# Altium PCB PCB_v1.PcbDoc
Units mil, origin at the board's own origin, x right, y up, seen from the top; angles counter-clockwise.
Board outline 2519.68 x 1299.21 mil, 2 copper layers (Top Layer, Bottom Layer); 35 components, 21 nets, 155 pads, 15 vias.
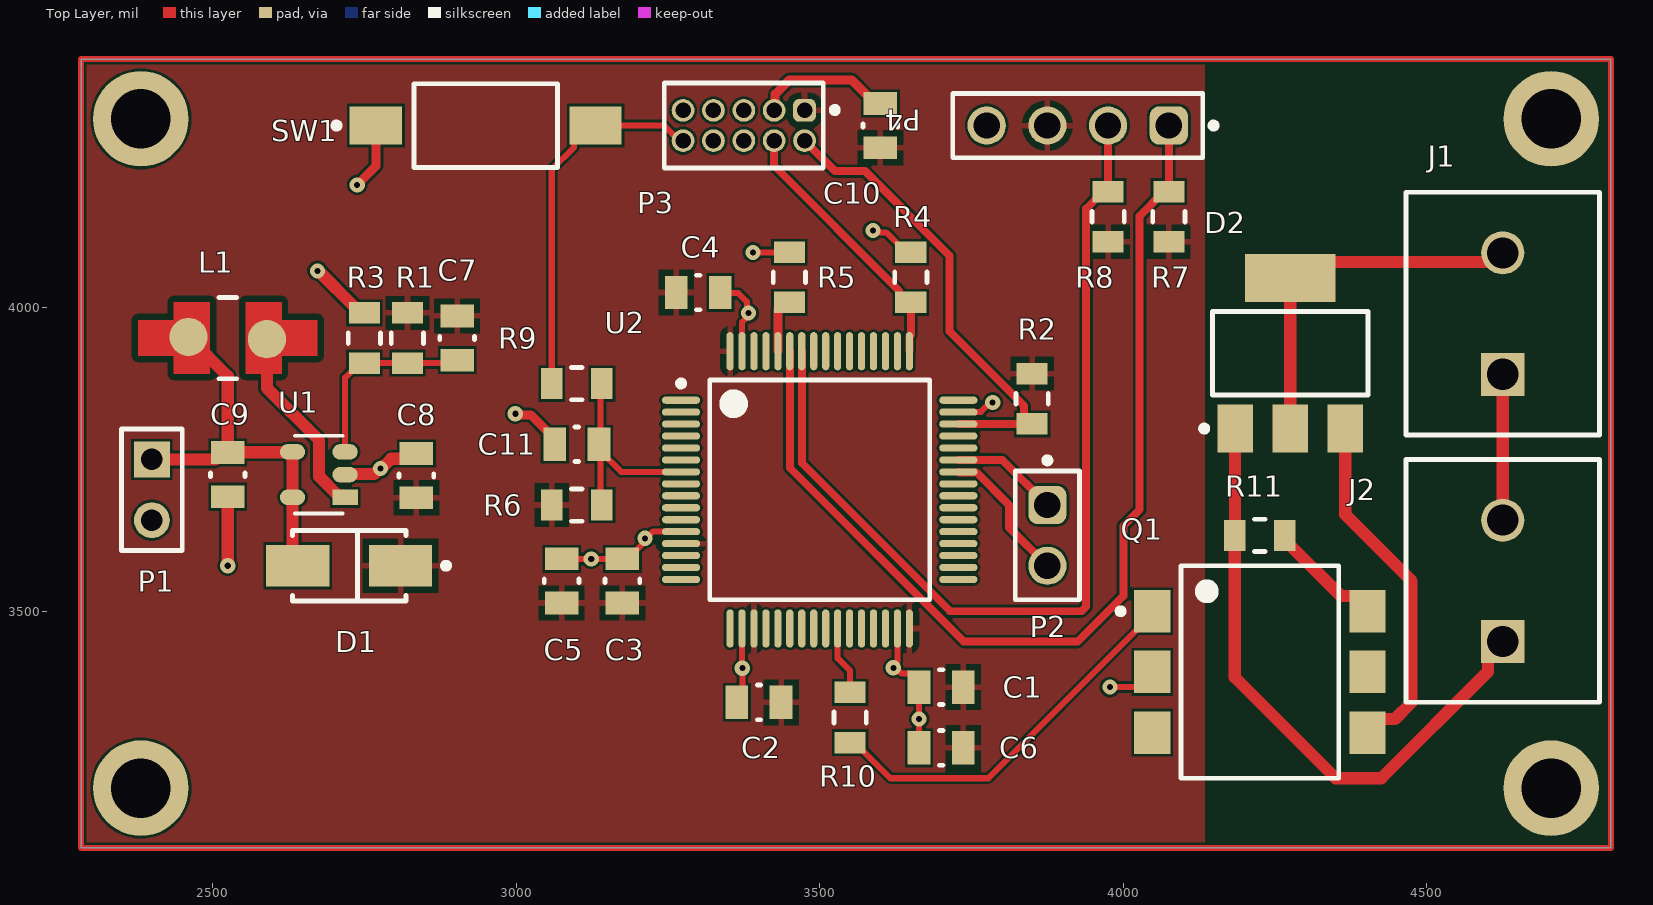
[diagram p0: Top Layer view]
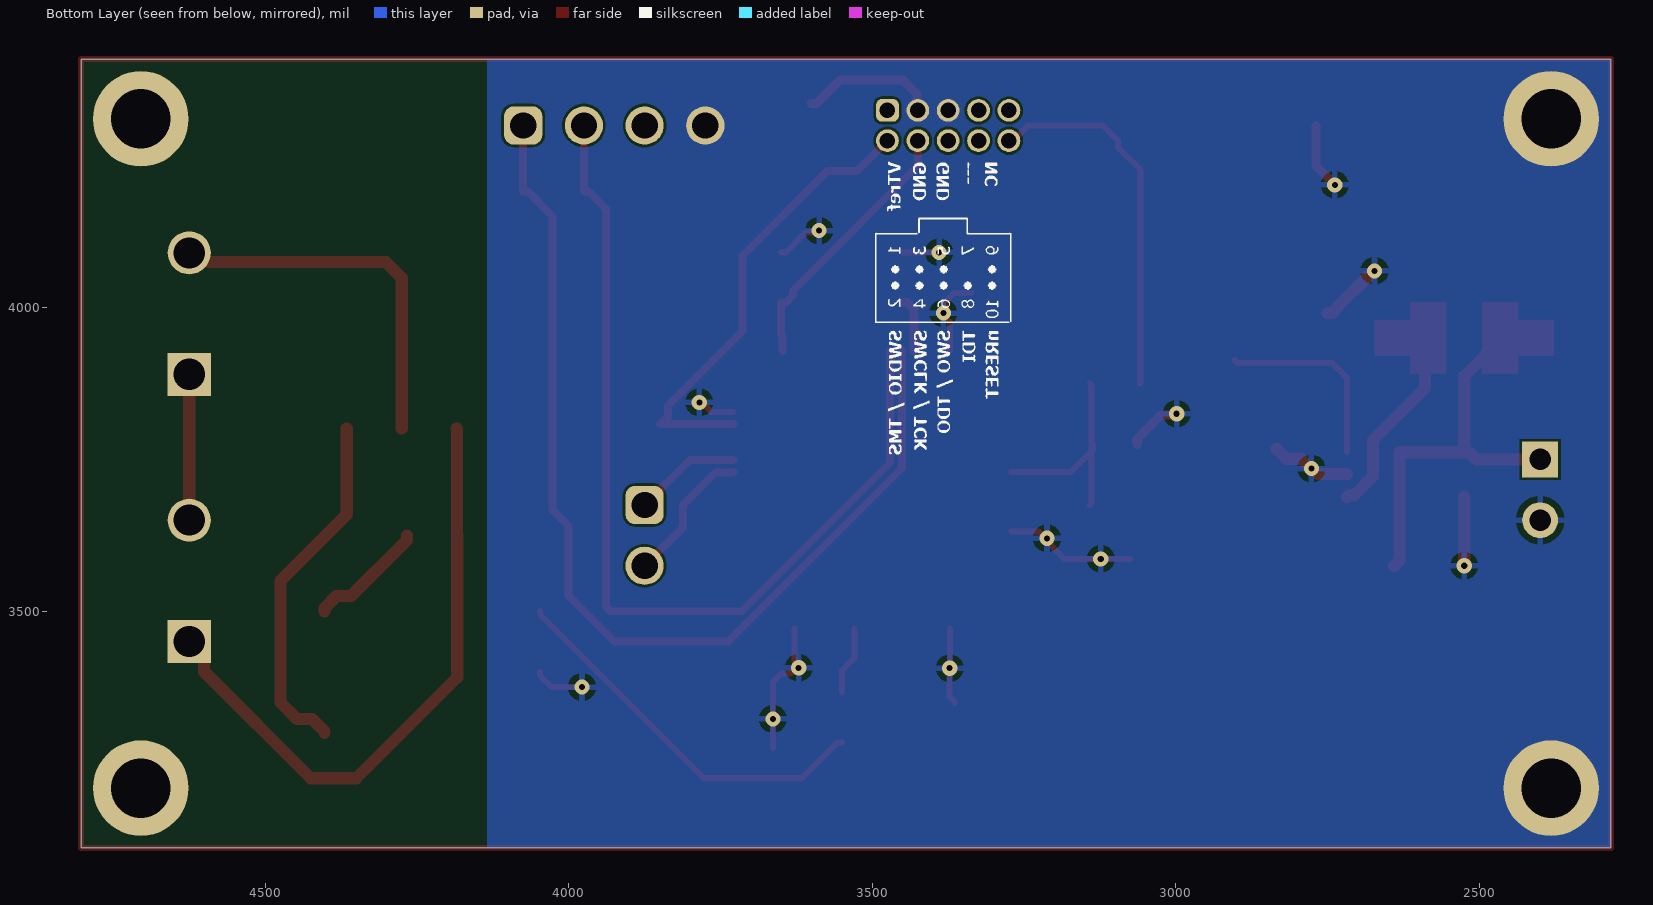
[diagram p1: Bottom Layer view, seen from below]
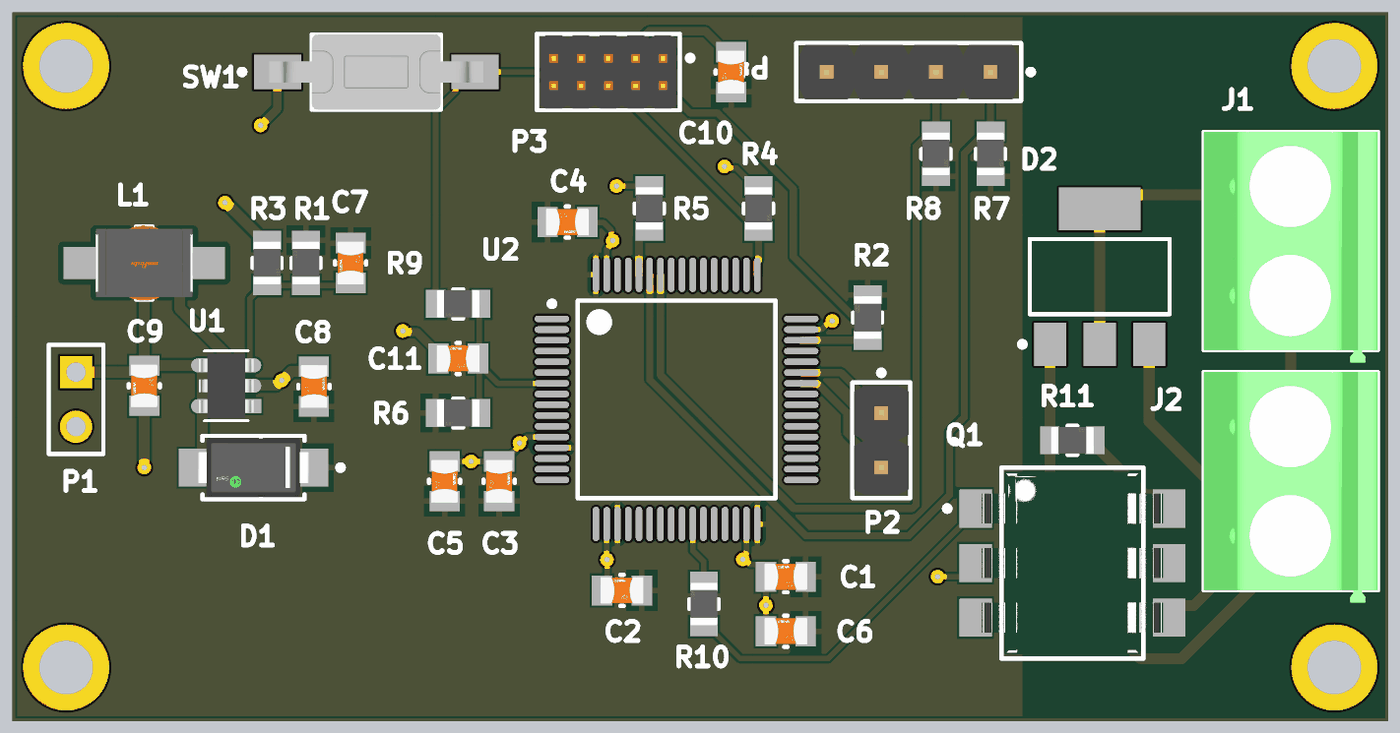
[diagram p2: 3D render of the assembled board from above, using the file's embedded part models]

## Layer stack, top to bottom
Top Solder: solder mask 0.4, Solder Resist, Dk 3.5
Top Layer: signal copper 1.4
Dielectric 1: dielectric 12.6, FR-4, Dk 4.6
Bottom Layer: signal copper 1.4
Bottom Solder: solder mask 0.4, Solder Resist, Dk 3.5

## Board outline
2283.46,3110.24 2283.46,4409.45 4803.15,4409.45 4803.15,3110.24

## Design rules (kind name [scope] priority, off if disabled: settings)
AssemblyTestPointUsage [All] p1: isadvanced=TRUE
AssemblyTestpoint [All] p1: isadvanced=TRUE testpointundercomponent=TRUE minsize=40 maxsize=100 preferedsize=60 minholesize=0 maxholesize=40 preferedholesize=32 testpointgrid=1 usegrid=TRUE gridtolerance=0.01 allowsidetop=TRUE allowsidebottom=TRUE
Clearance Clearance_1 [OnMid vs OnMid] p1: gap=4 ignorepadtopadclearanceinfootprint=FALSE except(5: Arc-Via Track-Via SMDPad-Via THPad-Via Via-Via Via-Text; 10: Arc-Hole Track-Hole SMDPad-Hole THPad-Hole Via-Hole Fill-Fill Fill-Poly Fill-Region Fill-Hole Poly-Poly Poly-Region Poly-Hole Region-Region Region-Hole Text-Hole Hole-Hole) sourcerule=47 cellrowname=All cellrowtype=0 cellcolname=All cellcoltype=0 innerlayers=TRUE
Clearance Clearance_2 [(ExistsOnLayer('Top Layer') Or ExistsOnLayer('Bottom Layer')) vs (ExistsOnLayer('Top Layer') Or ExistsOnLayer('Bottom Layer'))] p2: gap=4 ignorepadtopadclearanceinfootprint=FALSE except(5: Arc-Via Track-Via SMDPad-Via THPad-Via Via-Via Via-Text; 10: Arc-Hole Track-Hole SMDPad-Hole THPad-Hole Via-Hole Fill-Fill Fill-Poly Fill-Region Fill-Hole Poly-Poly Poly-Region Poly-Hole Region-Region Region-Hole Text-Hole Hole-Hole) sourcerule=47 cellrowname=All cellrowtype=0 cellcolname=All cellcoltype=0 outerlayers=TRUE
Clearance [All] p3: gap=10 ignorepadtopadclearanceinfootprint=FALSE ismatrix=TRUE
ComponentClearance [All] p1: isadvanced=TRUE gap=10 collisioncheckmode=3 verticalgap=10 showdistances=FALSE
FabricationTestPointUsage [All] p1: isadvanced=TRUE valid=0 allowmultiple=FALSE
FabricationTestpoint [All] p1: isadvanced=TRUE side=3 testpointundercomponent=TRUE minsize=40 maxsize=100 preferedsize=60 minholesize=0 maxholesize=40 preferedholesize=32 testpointgrid=1 allowsidetop=TRUE allowsidebottom=TRUE usegrid=TRUE gridtolerance=0.01
FanoutControl Fanout_BGA [IsBGA] p1: isadvanced=TRUE bgadir=Out bgaviamode=Centered fanoutstyle=Auto fanoutdirection=Alternating viagrid=1 // Fanout_BGA (Default Rule)
FanoutControl Fanout_LCC [IsLCC] p2: isadvanced=TRUE bgadir=Out bgaviamode=Centered fanoutstyle=Auto fanoutdirection=Alternating viagrid=1 // Fanout_LCC (Default Rule)
FanoutControl Fanout_SOIC [IsSOIC] p3: isadvanced=TRUE bgadir=Out bgaviamode=Centered fanoutstyle=Auto fanoutdirection=Alternating viagrid=1 // Fanout_SOIC (Default Rule)
FanoutControl Fanout_Small [(CompPinCount < 5)] p4: isadvanced=TRUE bgadir=Out bgaviamode=Centered fanoutstyle=Auto fanoutdirection=OutThenIn viagrid=1 // Fanout_Small (Default Rule)
FanoutControl Fanout_Default [All] p5: isadvanced=TRUE bgadir=Out bgaviamode=Centered fanoutstyle=Auto fanoutdirection=Alternating viagrid=1 // Fanout_Default (Default Rule)
Height [All] p1: isadvanced=TRUE minheight=0 maxheight=1000 prefheight=500
HoleSize [All] p1: isadvanced=TRUE absolutevalues=TRUE maxlimit=100 minlimit=1 maxpercent=80.000 minpercent=20.000
HoleToHoleClearance [All] p1: isadvanced=TRUE gap=10 allowstackedmicrovias=TRUE
LayerPairs [All] p1: isadvanced=TRUE enforce=TRUE
MinimumSolderMaskSliver [All] p1: isadvanced=TRUE minsoldermaskwidth=10
NetAntennae [All] p1: isadvanced=TRUE netantennaetolerance=0
PasteMaskExpansion [All] p1: isadvanced=TRUE expansion=0
PlaneClearance [All] p1: isadvanced=TRUE clearance=20
PlaneConnect [All] p1: isadvanced=TRUE planeconnectstyle=Relief reliefexpansion=20 reliefentries=4 reliefconductorwidth=10 reliefairgap=10
PolygonConnect [All] p1: connectstyle=Relief reliefconductorwidth=10 reliefentries=4 polygonreliefangle="90 Angle" airgapwidth=10
RoutingCorners [All] p1: isadvanced=TRUE cornerstyle=45-Degree minsetback=100 maxsetback=100
RoutingPriority [All] p1: isadvanced=TRUE routingpriority=0
RoutingVias [All] p1: holewidth=10 width=25 viastyle="Through Hole" minholewidth=10 minwidth=25 maxholewidth=10 maxwidth=25
ShortCircuit [All] p1: isadvanced=TRUE allowed=FALSE
SilkToSilkClearance [All] p1: isadvanced=TRUE silktosilkclearance=10
SilkToSolderMaskClearance [IsPad] p1: isadvanced=TRUE minsilkscreentomaskgap=10 clearancetoexposedcopper=TRUE
SolderMaskExpansion [All] p1: isadvanced=TRUE expansion=4 istentingtop=FALSE
SupplyNets "Schematic Supply Nets_3" [InNet('BATT')] p1: voltage=0.000
SupplyNets "Schematic Supply Nets_4" [InNet('+3V3')] p2: isadvanced=TRUE voltage=0.000
SupplyNets "Schematic Supply Nets_2" [InNet('GND')] p3: isadvanced=TRUE voltage=0.000
SupplyNets "Schematic Supply Nets_1" [InNet('~230')] p4: isadvanced=TRUE voltage=0.000
SupplyNets "Schematic Supply Nets" [InNet('~N')] p5: isadvanced=TRUE voltage=0.000
UnRoutedNet [All] p1: isadvanced=TRUE
UnpouredPolygon [All] p1: isadvanced=TRUE
Width MaxMinWidth_1 [InNet('SWD_CLK')] p1: maxlimit=13.12 minlimit=13.12 preferedwidth=13.12 impedanceprofiledriven=TRUE impedanceprofileid={453E66AC-1D73-4F09-8EF6-78236249AB15} impedanceprofilevalue=50.000000 minimp=50.000000 maximp=50.000000 favimp=50.000000
Width MaxMinWidth_2 [InNet('SWD_DIO')] p2: maxlimit=13.12 minlimit=13.12 preferedwidth=13.12 impedanceprofiledriven=TRUE impedanceprofileid={453E66AC-1D73-4F09-8EF6-78236249AB15} impedanceprofilevalue=50.000000 minimp=50.000000 maximp=50.000000 favimp=50.000000
Width MaxMinWidth_3 [InNet('UART_RX')] p3: maxlimit=13.12 minlimit=13.12 preferedwidth=13.12 impedanceprofiledriven=TRUE impedanceprofileid={453E66AC-1D73-4F09-8EF6-78236249AB15} impedanceprofilevalue=50.000000 minimp=50.000000 maximp=50.000000 favimp=50.000000
Width MaxMinWidth_4 [InNet('UART_TX')] p4: maxlimit=13.12 minlimit=13.12 preferedwidth=13.12 impedanceprofiledriven=TRUE impedanceprofileid={453E66AC-1D73-4F09-8EF6-78236249AB15} impedanceprofilevalue=50.000000 minimp=50.000000 maximp=50.000000 favimp=50.000000
Width MaxMinWidth_5 [InNet('I2C_SCL')] p5: maxlimit=13.12 minlimit=13.12 preferedwidth=13.12 impedanceprofiledriven=TRUE impedanceprofileid={453E66AC-1D73-4F09-8EF6-78236249AB15} impedanceprofilevalue=50.000000 minimp=50.000000 maximp=50.000000 favimp=50.000000
Width MaxMinWidth_6 [InNet('I2C_SDA')] p6: maxlimit=13.12 minlimit=13.12 preferedwidth=13.12 impedanceprofiledriven=TRUE impedanceprofileid={453E66AC-1D73-4F09-8EF6-78236249AB15} impedanceprofilevalue=50.000000 minimp=50.000000 maximp=50.000000 favimp=50.000000
Width [All] p7: maxlimit=20 minlimit=4 preferedwidth=10 minimp=50.000000 maximp=50.000000 favimp=50.000000
4 further rules are at their usual default settings.

## Components (designator, comment, footprint, x,y, rotation, side; value= is the part's Value field where it differs from the comment)
C1 "10uF" FP-CC0805-0_85-MFG 3700,3375 r180 top value="100 nF"
C2 "100nF" FP-CC0805-0_85-MFG 3400,3350 r180 top value="100 nF"
C3 "100nF" FP-CC0805-0_85-MFG 3175,3550 r90 top value="100 nF"
C4 "100nF" FP-CC0805-0_85-MFG 3300,4025 r0 top value="100 nF"
C5 "100nF" FP-CC0805-0_85-MFG 3075,3550 r90 top value="100 nF"
C6 "1uF" FP-CC0805-0_85-MFG 3700,3275 r180 top value="100 nF"
C7 "10pF" FP-CC0805-0_85-MFG 2902.87,3950 r270 top value="100 nF"
C8 "10uF" FP-CC0805-0_85-MFG 2835.78,3723.55 r90 top value="100 nF"
C9 "4.7uF" FP-CC0805-0_85-MFG 2525,3725 r270 top value="100 nF"
C10 "100nF" FP-CC0805-0_85-MFG 3600,4300 r90 top value="100 nF"
C11 "100nF" FP-CC0805-0_85-MFG 3100,3775 r180 top value="100 nF"
D1 "SS14" FP-403AE-MFG 2725,3575 r0 top
D2 "Z0107MNT1G" ONSC-SOT-223-4-318E-04_V 4275,3925 r90 top
J1 "1729128" PHOE-1729128-2_V 4625,3990.31 r90 top
J2 "1729128" PHOE-1729128-2_V 4625,3550 r90 top
L1 "10uH" FP-LQH43CN_03-MFG 2525,3950 r180 top
P1 "Header 2" HDR1X2 2400,3750 r270 top
P2 "61300211121" 61300211121 3875,3625 r270 top
P3 "62201021121" 62201021121 3375,4300 r180 top
P4 "61300411121" 61300411121 3925,4300 r180 top
Q1 "MOC3021SR2VM" FP-646BY-MFG 4225,3400 r0 top
R1 "1M Ohm" FP-RMCF0805-MFG 2821.02,3950 r90 top
R2 "10k Ohm" FP-RMCF0805-MFG 3850,3850 r90 top
R3 "600k Ohm" FP-RMCF0805-MFG 2750,3950 r270 top
R4 "10k Ohm" FP-RMCF0805-MFG 3650,4050 r270 top
R5 "10k Ohm" FP-RMCF0805-MFG 3450,4050 r90 top
R6 "10k Ohm" FP-RMCF0805-MFG 3100,3675 r180 top
R7 "4k7 Ohm" FP-RMCF0805-MFG 4075,4150 r270 top
R8 "4k7 Ohm" FP-RMCF0805-MFG 3975,4150 r270 top
R9 "1k Ohm" FP-RMCF0805-MFG 3100,3875 r180 top
R10 "1k Ohm" FP-RMCF0805-MFG 3550,3325 r90 top
R11 "1k Ohm" FP-RMCF0805-MFG 4225,3625 r0 top
SW1 "FSMSMTR" TECO-FSMSMTR_V 2950,4300 r0 top
U1 "AP3031KTR-G1" SOT23-6_DIO 2675,3725 r180 top
U2 "STM32L053R8T6D" STM-LQFP64_L 3500,3700 r0 top

## Footprints (in the part's own frame and the unit in brackets; to place one, negate y for a bottom-side part, rotate by r counter-clockwise, add the part's x,y. Pads: shape width x height; smd on the part's side, far side on the other; paste and mask are expansions set on the pad)
61300211121 [mm] "Pin Header, pitch 2.54 mm, THT, Vertical, single row, 2p"
  rrect50% 1.6x1.6 hole 1.1: 1(-1.27,0)
  round 1.6 hole 1.1: 2(1.27,0)
  silkscreen extent -3.26,-1.35 2.69,1.35, body extent -2.54,-1.27 2.54,1.27, height 8.57
61300411121 [mm] "Pin Header, pitch 2.54 mm, THT, Vertical, single row, 4p"
  rrect50% 1.6x1.6 hole 1.1: 1(-3.81,0)
  round 1.6 hole 1.1: 2(-1.27,0) 3(1.27,0) 4(3.81,0)
  silkscreen extent -5.8,-1.35 5.23,1.35, body extent -5.08,-1.27 5.08,1.27, height 8.57
62201021121 [mm] "Pin Header, pitch 1.27 mm, THT, Vertical, dual row, 10p"
  rrect50% 0.95x0.95 hole 0.65: 1(-2.54,-0.635)
  round 0.95 hole 0.65: 2(-2.54,0.635) 3(-1.27,-0.635) 4(-1.27,0.635) 5(0,-0.635) 6(0,0.635) 7(1.27,-0.635) 8(1.27,0.635) 9(2.54,-0.635) 10(2.54,0.635)
  silkscreen extent -3.93,-1.78 3.32,1.78, body extent -3.17,-1.7 3.18,1.7, height 5.33
FP-403AE-MFG [mm]
  rect 2.65x1.75 smd paste+0 mask+0: 1(-2.15,0) 2(2.15,0)
  silkscreen extent -2.37,-1.48 4.18,1.48, body extent -3.57,-1.58 3.57,1.58, height 0.25
FP-646BY-MFG [mm]
  rect 1.52x1.78 smd paste+0 mask+0: 1(-4.505,2.54) 2(-4.505,0) 3(-4.505,-2.54) 4(4.505,-2.54) 5(4.505,0) 6(4.505,2.54)
  silkscreen extent -5.95,-4.44 3.3,4.44, body extent -5.37,-4.67 5.37,4.67, height 0.25
FP-CC0805-0_85-MFG [mm]
  rect 0.95x1.4 smd paste+0 mask+0: 1(-0.925,0) 2(0.925,0)
  silkscreen extent -0.08,-0.72 0.08,0.72, body extent -1.6,-1.05 1.6,1.05, height 0.25
FP-LQH43CN_03-MFG [mil]
  round 63.12 smd paste+0 mask+0: 1(-64.59,1.85) 2(64.59,-1.85)
  Top Layer region: 147.64,29.53 88.58,29.53 88.58,59.06 29.53,59.06 29.53,-59.06 88.58,-59.06 88.58,-29.53 147.64,-29.53 147.64,29.53
  Top Layer region: -147.64,29.53 -88.58,29.53 -88.58,59.06 -29.53,59.06 -29.53,-59.06 -88.58,-59.06 -88.58,-29.53 -147.64,-29.53 -147.64,29.53
  silkscreen extent -15,-67 15,67, body extent -152,-71 152,71, height 10
FP-RMCF0805-MFG [mm]
  rect 0.9x1.3 smd paste+0 mask+0: 1(-1.05,0) 2(1.05,0)
  silkscreen extent -0.23,-0.67 0.23,0.67, body extent -1.6,-0.77 1.6,0.77, height 0.25
HDR1X2 [mm] "Connector; Header; 2 Position"
  rect 1.5x1.5 hole 0.9: 1(0,0)
  round 1.5 hole 0.9: 2(2.54,0)
  silkscreen extent -1.27,-1.27 3.81,1.27
ONSC-SOT-223-4-318E-04_V [mm] "SOT223, 4-Leads, Body 6.5x3.5mm, Pitch 2.3mm"
  rect 2x1.5 smd: 1(-3.15,2.3) 2(-3.15,0) 3(-3.15,-2.3)
  rect 2x3.8 smd: 4(3.15,0)
  silkscreen extent -3.27,-3.25 1.75,3.72, body extent -1.75,-3.25 1.75,3.25, height 1.75
PHOE-1729128-2_V [mm] "Receptacle, 2-Leads, Body 8.1x10.16mm, Pitch 5.08mm"
  rect 1.8x1.8 hole 1.3: 1(-2.54,0)
  round 1.8 hole 1.3: 2(2.54,0)
  silkscreen extent -5.08,-4.05 5.08,4.05, body extent -5.65,-4.05 5.08,4.05, height 10.01
SOT23-6_DIO [mm]
  rect 1.06x0.65 smd paste+0 mask+0: 1(-1.1,0.95)
  oval 1.06x0.65 smd paste+0 mask+0: 2(-1.1,0) 3(-1.1,-0.95) 4(1.1,-0.95) 5(1.1,0.95)
  silkscreen extent -1,-1.63 1,1.63, body extent -1.28,-1.5 1.28,1.5, height 1.45
STM-LQFP64_L [mm] "QFP, 64-Leads, Body 10x10mm, Pitch 0.5mm, IPC High Density"
  oval 1.6x0.3 smd: 1(-5.8,3.75) 2(-5.8,3.25) 3(-5.8,2.75) 4(-5.8,2.25) 5(-5.8,1.75) 6(-5.8,1.25) 7(-5.8,0.75) 8(-5.8,0.25) 9(-5.8,-0.25) 10(-5.8,-0.75) 11(-5.8,-1.25) 12(-5.8,-1.75) 13(-5.8,-2.25) 14(-5.8,-2.75) 15(-5.8,-3.25) 16(-5.8,-3.75) 33(5.8,-3.75) 34(5.8,-3.25) 35(5.8,-2.75) 36(5.8,-2.25) 37(5.8,-1.75) 38(5.8,-1.25) 39(5.8,-0.75) 40(5.8,-0.25) 41(5.8,0.25) 42(5.8,0.75) 43(5.8,1.25) 44(5.8,1.75) 45(5.8,2.25) 46(5.8,2.75) 47(5.8,3.25) 48(5.8,3.75)
  oval 0.3x1.6 smd: 17(-3.75,-5.8) 18(-3.25,-5.8) 19(-2.75,-5.8) 20(-2.25,-5.8) 21(-1.75,-5.8) 22(-1.25,-5.8) 23(-0.75,-5.8) 24(-0.25,-5.8) 25(0.25,-5.8) 26(0.75,-5.8) 27(1.25,-5.8) 28(1.75,-5.8) 29(2.25,-5.8) 30(2.75,-5.8) 31(3.25,-5.8) 32(3.75,-5.8) 49(3.75,5.8) 50(3.25,5.8) 51(2.75,5.8) 52(2.25,5.8) 53(1.75,5.8) 54(1.25,5.8) 55(0.75,5.8) 56(0.25,5.8) 57(-0.25,5.8) 58(-0.75,5.8) 59(-1.25,5.8) 60(-1.75,5.8) 61(-2.25,5.8) 62(-2.75,5.8) 63(-3.25,5.8) 64(-3.75,5.8)
  silkscreen extent -5.92,-4.6 4.6,4.6, body extent -5,-5 5,5, height 1.6
TECO-FSMSMTR_V [mm] "SMD, 2-Leads, Body 6x3.5mm, Pitch 9.19mm"
  rect 2.2x1.6 smd: 1(-4.595,0)
  rect 2.18x1.6 smd: 2(4.595,0)
  silkscreen extent -6.37,-1.75 3,1.75, body extent -4.98,-1.75 4.98,1.75, height 4.4

## Part data
C1 C2 C3 C4 C5 C6 C7 C8 C9 C10 C11: library part CMP-2100-03606-3, "CAP CER 0.1UF 50V X7R 0805", Capacitance="100 nF", Manufacturer=Yageo, Manufacturer Part Number=CC0805KRX7R9BB104, Package=CC0805-0.85, Temperature="-30°C to +85°C", Temperature Characteristic=X7R, Temperature Range High=+85°C, Temperature Range Low=-30°C, Tolerance=0.1, Voltage Rating="50 V", Automotive=No, Category=Cap, ComponentLink2Description=Datasheet, ComponentLink2URL=http://www.yageo.com/documents/recent/UPY-GPHC_Y5V_6.3V-to-50V_8.pdf, Device Class L1="Passive Components", Device Class L2=Capacitors, Device Class L3="Ceramic Capacitors", Digikey Description="CAP CER 0.1UF 50V X7R 0805", Footprint Url=http://www.yageo.com/exep/pages/download/literatures/UPY-C_GEN_24.pdf, Height=0.95mm, Ipc Land Pattern Name=CAPC200125X85, Lead Free=Yes, Material=Ceramic, Mouser Description="Multilayer Ceramic Capacitors MLCC - SMD/SMT 100nF 50V X7R 10%", Octopart=https://octopart.com/cc0805krx7r9bb104-yageo-192993, RoHS=TRUE
D1: library part CMP-2000-04943-2, "DIODE SCHOTTKY 40V 1A SMA", Forward Current=1A, Manufacturer="ON Semiconductor", Max Junction Temp=+125°C, Max Repetitive Reverse Voltage=40V, Max Surge Forward Current=40A, Package=403AE, Peak Reverse Current=0.2mA, Temperature="-65°C to +125°C", Temperature Range Low=-65°C, Automotive=No, Category=Diode, ComponentLink2Description=Datasheet, ComponentLink2URL=https://www.onsemi.com/pub/Collateral/SS19-D.PDF, Device Class L1="Discrete Semiconductors", Device Class L2=Diodes, Device Class L3="Schottky Diodes", Digikey Description="DIODE SCHOTTKY 40V 1A SMA", Height=2.5mm, Lead Free=Yes, Manufacturer Part Number=SS14, Mouser Description="Schottky Diodes & Rectifiers SMA 40V 1.0A", Octopart=https://octopart.com/ss14-on+semiconductor-29205033, RoHS=TRUE, Standoff Height=0.05mm, Temperature Range High=+125°C
D2: library part CMP-1070-00032-1, "Sensitive Gate Triac Series, Silicon Bidirectional Thyristor, 4-Pin SOT-223, Pb-Free, Tape and Reel", Manufacturer="On Semiconductor", ComponentLink1Description="Manufacturer URL", ComponentLink1URL=http://www.onsemi.com/, ComponentLink2Description=Datasheet, ComponentLink2URL=http://www.onsemi.com/pub_link/Collateral/Z0103MN-D.PDF, ComponentLink3Description="Package Specification", ComponentLink3URL=http://www.onsemi.com/pub_link/Collateral/318E-04.PDF, DatasheetVersion="Rev. 3", IT(RMS) Max (A)=1, ITSM Max (A)=8, Mounting Technology="Surface Mount", PackageDescription="4-Pin Small Outline Transistor, Body 6.5 x 3.5 mm, Pitch 2.3 mm", PackageReference=SOT-223-4-318E-04, PackageVersion="Rev. N, 08/2009", Packing="Tape and Reel", PartNumber=Z0107MNT1G, RoHS=Pb-Free
J1 J2: library part CMP-2000-05815-1, "PCB Terminal Block, 13.5 A, 400 V, 2-Pin THD, RoHS, Bulk", Current Rating=13500mA, Manufacturer="Phoenix Contact", Package Description="2-Pin Through Hole Device, Body 8.1 x 10.16 mm, Pitch 5.08 mm", Package Reference=1729128-2, Package Version=03/2015, Voltage Rating=400V, Datasheet URL=https://datasheet.ciiva.com/16046/1729128-16046181.pdf, Datasheet Version=12/2013, Manufacturer URL=http://www.phoenixcontact.com/, Mounting Technology=ThroughHole, No. of Positions=2, No. of Rows=1, Orientation=Horizontal, Package URL=https://www.phoenixcontact.com/online/portal/pi/pxc/product_detail_page/!ut/p/b1/3VdJjqNKFDxLH8AFycySyWY2ozFsEPOMMQaDOX1XedGL_1Vdm5YXJleknhSKeBkvI6EA8ncAo3AYoDhBQGco6KN7VURTdemj9us_IEKEZo_YHiPAEWEFmDGOHMORkqKYCORBZxgL7ZoaZYcbFFUZ3fqxSY6GOuxydWUuHqz1ynmMFygu583Bob0Ewr6Sd_l-5m-kAueHiB0jpRwZwe58wwtkpxtMYd_LmGcDRU02dRNEyWt6Y2ti5pSyJ_reIkzIulrqApdnbT11V5jnCKbYNCvhEM1MCpPByat_X379-iThf08CI5GfOPqfBeS3BRoBOdD55AKVv0iLwCMq-2BrzXWSGRH7pUGD9uwXQjiph3xL0DKQwdGa0JImiIOmBNOestqgwTHSSs2oOep-78apyXQBvNi8ZLaFjvjWvcaUEBu0MC6Wbe-d6mB0FAebo2lUWinqYaZs5DAYzV0RP9yitUjnGJ0iI9xhZkT42OCQNUJJhkgWINNQLP2JFP6OpMg3JCVg70jqHT0lvKOnhHf0lPuOnnLf0VPuWx6_dxwUIvwk5WMkT0kLL1mh61l2yZVSzG3pYV_bqo-mj6uMKwKwdnnW8Jh5RTOJzMOA5c-eJDaZQw4mTMPH02PvS_ZAqNVjVTo2WyYLkwH_KU1mmmG5kjRhDqPXLwwVHvVOjCM60-fpXvTDfMGW1PVFVS1r4e4yVDk4ZdNbkUHvqPqQSeian4UD39fNKmachqdJ1NJbyk8rXT9mXTvPk3oE5meulKGgiruPJek-4I9hTT6G8ZLOyRSm2RRVbThERQad5OS28hdt4YW4vG0stgYYzsWsK4_7y6DZMjJSCqri1kyiZR5vD7pwIrNR7QwPHTcLTI5qT7eRlpHrdGiupYlqQDJ7zy_CND8fWWBoLRXxk1RVcXiBQwbTD4Xi7KL-FuO94t9xaqweXzH, Packing=Bulk, PartNumber=1729128, Pitch=5.08mm, RoHS=TRUE
L1: library part CMP-06042-007054-1, "Wire Wound Ferrite Inductor for General Circuits 470μH ±10% 11.8Ω 80mA 1812", Case Code (Imperial)=1812, Case Code (Metric)=4532, Current Rating=80mA, DC Resistance (DCR)=11.8R, Frequency=3MHz, Inductance=470uH, Max Operating Temperature=85°C, Min Operating Temperature=-40°C, Package Quantity=500, Resistor Type=Wirewound, Test Frequency=1kHz, Tolerance=10%, Case/Package=1812, Core Material=Ferrite, DC Current=80mA, Depth=3.4mm, Height=2.6mm, Height - Seated (Max)=0.11inch, Lead Free="Lead Free", Length=4.5mm, Max DC Current=80mA, Military Standard=Not, Mount="Surface Mount", Packaging="Tape and Reel", Q Factor=40, Radiation Hardening=No, Self Resonant Frequency=3MHz, Series Resistance=11.8R, Shielding=Unshielded, Termination=SMD/SMT, Weight=0.004586oz, Width=3.2mm
P1: "Header, 2-Pin", LatestRevisionDate=17-Jul-2002, LatestRevisionNote="Re-released for DXP Platform.", Publisher="Altium Limited"
P2: library part CMP-1712-00002-6, Color=Black, Contact Resistance=20mΩ, Current Rating=3A, Max Operating Temperature=125°C, Min Operating Temperature=-40°C, Operating Supply Voltage=250V, Connector Type="Male Pin", Contact Gender=Male, Contact Material=Copper, Contact Mating Length=5.9944mm, Contact Plating=Gold, Gender=Male, Height=8.94mm, Housing Material=PBT, Lead Free="Lead Free", Lead Pitch=2.54mm, Mount="Through Hole", NexarPartId=20081794, Number of Contacts=2, Number of Pins=2, Number of Positions=2, Number of Rows=1, Orientation=Vertical, Packaging=Bulk, Pitch=2.54mm, REACH SVHC="No SVHC", RoHS=Compliant, Termination="Through Hole", Voltage Rating=250V
P3: library part CMP-1502-00948-3, Color=Black, Contact Resistance=20mΩ, Current Rating=1A, Max Operating Temperature=105°C, Min Operating Temperature=-40°C, Operating Supply Voltage=100V, Connector Type="Male Pin", Contact Material=Copper, Contact Mating Length=3.81mm, Contact Plating=Gold, Gender=Male, Height=5.65mm, Lead Pitch=1.27mm, Mount="Through Hole", NexarPartId=32855586, Number of Contacts=10, Number of Pins=10, Number of Positions=10, Number of Rows=2, Orientation=Vertical, Packaging=Box, Pitch=1.27mm, REACH SVHC=Unknown, RoHS=Compliant, Row Spacing=1.27mm, Termination=Solder, Voltage Rating=100V
P4: library part CMP-1502-01064-3, Color=Black, Contact Resistance=20mΩ, Current Rating=3A, Max Operating Temperature=105°C, Min Operating Temperature=-40°C, Operating Supply Voltage=250V, Connector Type="Male Pin", Contact Material=Copper, Contact Mating Length=5.9944mm, Contact Plating=Gold, Gender=Male, Height=8.89mm, Lead Free="Lead Free", Lead Pitch=2.54mm, Mount="Through Hole", NexarPartId=32855522, Number of Contacts=4, Number of Pins=4, Number of Positions=4, Number of Rows=1, Orientation=Vertical, Packaging=Bulk, Pitch=2.54mm, REACH SVHC=Unknown, RoHS=Compliant, Termination=Solder, Voltage Rating=250V
Q1: library part CMP-00278-84330366-1, "MOC3021SR2VM Triac Driver Output Optocoupler, 6-Pin DIP 400V Random Phase", Case/Package=SMD/SMT, Forward Current=60mA, Forward Voltage=1.15V, Hold Current=100µA, Isolation Voltage=7.5kV, Manufacturer Lifecycle Status=ACTIVE, Max Input Voltage=1.5V, Max Operating Temperature=85°C, Max Power Dissipation=330mW, Min Operating Temperature=-40°C, Output Voltage=400V, Reverse Breakdown Voltage=3V, Approvals="EN, IEC, UL", Input Current=60mA, Lead Free="Lead Free", Lifecycle Status=Production, Mount="Surface Mount", NexarPartId=84330366, Nominal Input Voltage=1.15V, Number of Channels=1, Number of Circuits=1, Number of Elements=1, Number of Pins=6, Packaging=Digi-Reel®, Power Dissipation=330mW, Radiation Hardening=No, REACH SVHC="No SVHC", RoHS=Compliant, Schedule B="8541408000, 8541408000", Weight=810mg
R1 R2 R3 R4 R5 R6 R7 R8 R9 R10 R11: library part CMP-26527-000017-1, "RES 0 OHM JUMPER 1/8W 0805", Case Code (Imperial)=0805, Case Code (Metric)=2012, Max Operating Temperature=155°C, Max Power Dissipation=125mW, Min Operating Temperature=-55°C, Resistance=0mR, Case/Package=0805, Composition="Thick Film", Contact Plating=Tin, Depth=1.25mm, Features="Automotive AEC-Q200", Height=0.026inch, Lead Free="Lead Free", Length=2mm, Military Standard=Not, Mount="Surface Mount", Number of Terminations=2, Packaging="Tape and Reel", Power Rating=125mW, Radiation Hardening=No, Width=0.049inch
SW1: library part CMP-2000-07501-1, "FSMSM Push Button Switch, 50 mA, -35 to 85 degC, 2-Pin SMD, RoHS, Tape and Reel", Case\/Package=SMD/SMT, Contact Current Rating=50mA, Contact Resistance=100mOhm, Manufacturer="TE Connectivity", Max Operating Temperature=85degC, Max Voltage Rating (DC)=12V, Min Operating Temperature=-35degC, Operating Force=180gf, Package Description="2-Pin Surface Mount Device, Body 6 x 3.5 mm, Pitch 9.19 mm", Package Quantity=1800, Voltage Rating (DC)=24V, Actuator Length=1.07mm, Actuator Material=Polyamide, Contact Material=Brass, Contact Plating=Silver, Current Rating=50mA, Datasheet URL=http://www.te.com/commerce/DocumentDelivery/DDEController?Action=showdoc&DocId=Customer+Drawing%7F1437566-3%7FC2%7Fpdf%7FEnglish%7FENG_CD_1437566-3_C2_1437566_3_1_c.dwg.pdf%7F1437566-4, Datasheet Version="Rev. C2, 08/2014", Electrical Life=20000Cycles, ELV=Compliant, Illumination Type=Illuminated, Lead Free=LeadFree, Manufacturer URL=http://www.te.com/, Mechanical Life=20000Cycles, Mount=SurfaceMount, Mounting Technology=SurfaceMount, Orientation=Straight, Package Reference=FSMSMTR, Packaging=TapeandReel, REACH SVHC=Unknown, RoHSCompliant=true, Switch Travel=0.25mm, Termination=GullWing, Throw Configuration=SPST
U1: "No Description Available", Mfr_Name="Diodes Inc", RefDes=RefDes, Type=Type
U2: library part CMP-1546-00063-2, "Ultra-low-power 32-Bit MCU ARM-based Cortex-M0+, 64 KB Flash, 8 KB RAM, 51 I/Os, 64-Pin LQFP, -40 to 85 degC, Tray", I/Os (High Current)=51, Operating Frequency(F) (Processor speed) (MHz)=32, Package Description="64-Pin Low-profile Quad Flat Package, Body 10 x 10 mm, Pitch 0.5 mm", Package Reference=LQFP64, Supply Voltage(Vcc) min (V)=1.65, ComponentLink1Description="Manufacturer URL", ComponentLink1URL=http://www.st.com/, ComponentLink2Description=Datasheet, ComponentLink2URL=http://www.st.com/st-web-ui/static/active/en/resource/technical/document/datasheet/DM00105960.pdf, Core="ARM Cortex-M0+", D/A Converter=1, Data E2PROM nom (B)=2048, DatasheetVersion="Rev. 5", FLASH Size (Prog) (kB)=64, Internal RAM Size (kB)=8, Mounting Technology="Surface Mount", Packing=Tray

## Free pads (board coordinates)
  round 157.48 hole 98.43: 2(2381.89,3208.66) 2(2381.89,4311.02) 2(4704.72,3208.66) 2(4704.72,4311.02)

## Via types
v1: diameter 25, hole 10, Top Layer to Bottom Layer, 15 vias

## Nets (pads, with @x,y where several pads share a name; then routed paths per layer and width w, separated by ;. In a path a pad name is that pad's centre, name@x,y a point inside that pad or via, vN(x,y) a via of type N, cw(c..) or ccw(c..) an arc to the next point about the centre after c; other vN are vias at no path point)
+3V3: C1.1 C2.1 C3.1 C4.1 C5.1 C6.1 C7.1 C8.1 C10.1 D1.2 P3.1 P4.3 R1.2 R2.2 R6.2 R7.2 R8.2 U2.13 U2.19 U2.32 U2.64
BATT: C9.1 D1.1 L1.2 P1.1 U1.4 U1.5 | length 645
  Top Layer w20: P1.1 2504.72,3750 2516.14,3761.42 C9.1 ; L1.2 2525,3887.25 C9.1 ; D1.1 2631.69,3583.66 U1.5 U1.4 2631.2,3761.91 2525.49,3761.91 C9.1
FAN_CTRL: R10.2 U2.26 | length 113.8
  Top Layer w10: U2.26 3529.53,3422.55 3550,3402.08 R10.2
GND: C1.2 C2.2 C3.2 C4.2 C5.2 C6.2 C8.2 C9.2 C10.2 C11.2 P1.2 P3.3 P3.5 P4.4 pad.2@2381.89,3208.66 pad.2@2381.89,4311.02 Q1.2 R3.1 R4.1 R5.2 SW1.1 U1.2 U2.12 U2.18 U2.31 U2.47 U2.63 | length 1774.5
  Top Layer w10: C5.2 3075.09,3586.32 3183.76,3586.32 3209.39,3611.95 3209.39,3617.31 v1(3212.26,3620.18) 3214.24,3620.18 3225.16,3631.1 U2.12 ; C4.2@3336.42,4024.02 3365.84,4024.02 3380.08,4009.79 3380.08,3993.92 v1(3382.95,3991.05) 3382.95,3987 3372.05,3976.09 U2.63 ; C2.2 3372.56,3358.98 v1(3372.56,3406.25) 3372.3,3406.5 3372.3,3471.4 U2.18 ; v1(3390.01,4091.08) 3449.74,4091.08 R5.2 ; v1(3587.67,4126.89) 3590.54,4124.02 3609.45,4124.02 3642.13,4091.34 R4.1 ; U2.31 3627.95,3417.66 3621.24,3410.95 v1(3621.24,3406.89) 3625.3,3406.89 3634.63,3397.56 3649.88,3397.56 3663.69,3383.75 3663.69,3275.11 C6.2 ; U2.47 3728.69,3828.3 3765.23,3828.3 3780.86,3843.93 v1(3784.92,3843.93) ; v1(3978.1,3375.19) 4027.95,3375.19 4047.64,3394.88 Q1.2
  Top Layer w15: v1(2738.21,4202.25) 2769.09,4233.13 SW1.1 ; v1(2998.65,3825.36) 3000.56,3823.45 3023.99,3823.45 3063.58,3783.86 C11.2 ; P3.3 3426.63,4326.63 3426.63,4351.63 3450,4375 3552.56,4375 3591.14,4336.42 C10.2
  Top Layer w20: v1(2525,3575) C9.2 ; v1(2672.84,4060.65) 2673.8,4059.7 2675.3,4059.7 2734.41,4000.59 2734.41,3999.06 2742.13,3991.34 R3.1 ; U1.2 2719.38,3726.07 2766.4,3726.07 2775.35,3735.02 2778.06,3735.02 2794.3,3751.27 2818.22,3751.27 2833.78,3766.82 C8.2@2833.78,3768.13
  other v1: 3663.69,3322.64 3123.67,3586.32 2776.7,3735.02
I2C_SCL: P4.2 R8.1 U2.58 | length 1568.6
  Top Layer w13.12: U2.58 3470.47,3744.44 3714.91,3500 3931.17,3500 3938.85,3507.68 3938.85,4163.06 3967.13,4191.34 R8.1 P4.2
I2C_SDA: P4.1 R7.1 U2.59 | length 1701.6
  Top Layer w13.12: U2.59 3450.79,3736.31 3737.1,3450 3925,3450 4000,3525 4000,3640.53 4026.96,3667.49 4026.96,4151.18 4067.13,4191.34 R7.1 P4.1
NetC7_2: C7.2 R1.1 R3.2 U1.3 | length 318.9
  Top Layer w10: U1.3 2718.31,3884.84 2742.13,3908.66 R3.2 2897.95,3908.66 C7.2
NetC11_1: C11.1 R6.1 R9.1 U2.7 | length 363.3
  Top Layer w10: R6.1 3138.88,3677.46 3138.88,3772.54 C11.1 ; R9.1 3138.88,3872.54 3138.88,3777.46 C11.1 ; U2.7 3173.03,3729.53 3136.42,3766.14 C11.1
NetD2_2: D2.2 D2.4 J1.2 | length 608.8
  Top Layer w20: D2.2 D2.4 4300.98,4075 J1.2@4625,4075
NetD2_3: D2.3 Q1.4 | length 591.1
  Top Layer w20: D2.3 4365.55,3659.45 4475,3550 4475,3350 4447.37,3322.37 4422.28,3322.37 4402.36,3302.45 Q1.4
NetL1_1: L1.1 U1.1 | length 318.9
  Top Layer w20: L1.1 2589.59,3867.45 2675.53,3781.52 2675.53,3721.82 2706.95,3690.39 2715.51,3690.39 U1.1
NetQ1_1: Q1.1 R10.1 | length 638.8
  Top Layer w10: R10.1 3557.87,3283.66 3616.54,3225 3777.76,3225 4047.64,3494.88 Q1.1
NetQ1_6: Q1.6 R11.2 | length 195.4
  Top Layer w20: R11.2 4266.34,3617.13 4358.43,3525.04 4382.44,3525.04 4402.36,3505.12 Q1.6
NetR5_1: R5.1 U2.60 | length 92.8
  Top Layer w15: U2.60 3431.1,3997.64 3442.13,4008.66 R5.1
RESET_PIN: P3.10 R9.2 SW1.2 | length 616.1
  Top Layer w10: R9.2 3058.66,4227.76 3095.49,4264.59 3095.49,4276 3119.49,4300 SW1.2 3243.94,4300 3268.94,4275 P3.10
SWD_CLK: P3.4 R4.2 U2.49 | length 445.4
  Top Layer w13.12: P3.4 3425,4233.66 3630.97,4027.69 3630.97,4019.82 3642.13,4008.66 R4.2 3650,3954.99 3647.64,3952.63 U2.49
SWD_DIO: P3.2 R2.1 U2.46 | length 773.7
  Top Layer w13.12: P3.2 3525,4225 3574.58,4225 3713.86,4085.72 3713.86,3961.14 3836.63,3838.37 3836.63,3819.82 3847.79,3808.66 R2.1 R2.1@3842.13,3808.66 ; U2.46 3728.54,3808.46 R2.1@3842.13,3808.46
UART_RX: P2.1 U2.43 | length 177.4
  Top Layer w13.12: U2.43 3800.79,3749.21 P2.1
UART_TX: P2.2 U2.42 | length 232.4
  Top Layer w13.12: U2.42 3729,3728.88 3758.19,3728.88 3811.82,3675.24 3811.82,3638.18 P2.2
~230: D2.1 J2.1 R11.1 | length 1028.1
  Top Layer w20: D2.1 4184.06,3800.59 4184.06,3625.39 R11.1 4183.66,3391.34 4350,3225 4425,3225 4600.85,3400.85 4600.85,3425.85 J2.1
~N: J1.1 J2.2 | length 275
  Top Layer w20: J2.2@4625,3625 4625,3875 J1.1@4625,3900
pads on no net: P3.6 P3.7 P3.8 P3.9 Q1.3 Q1.5 U2.1 U2.2 U2.3 U2.4 U2.5 U2.6 U2.8 U2.9 U2.10 U2.11 U2.14 U2.15 U2.16 U2.17 U2.20 U2.21 U2.22 U2.23 U2.24 U2.25 U2.27 U2.28 U2.29 U2.30 U2.33 U2.34 U2.35 U2.36 U2.37 U2.38 U2.39 U2.40 U2.41 U2.44 U2.45 U2.48 U2.50 U2.51 U2.52 U2.53 U2.54 U2.55 U2.56 U2.57 U2.61 U2.62
copper on no net: | length 7637.8
  Top Layer w10: 2283.46,3110.24 4803.15,3110.24 4803.15,4409.45 2283.46,4409.45 2283.46,3110.24

## Polygon pours and split planes (outlines as drawn)
GND on Bottom Layer "GND_L02_P000" (solid, pour order 0): 2283.46,4409.45 2283.46,3110.24 4133.86,3110.24 4133.86,4409.45
+3V3 on Top Layer "+3V3_L01_P001" (solid, remove dead copper, pour order 1): 2283.46,4409.45 4133.86,4409.45 4133.86,3110.24 2283.46,3110.24

## Silkscreen, mask and mechanical layers (free items; w line width, h text height)
Bottom Overlay:
  drawing of 73 lines, arcs and shapes, not listed